# Altium PCB LimeSDR-Micro_mPCIe_1v4.PcbDoc (part 10 of 11)
Units mm, origin at the board's own origin, x right, y up, seen from the top; angles counter-clockwise.
Board outline 50.8 x 29.7 mm, 8 copper layers (Top, L2, L3, L4, L5, L6, L7, Bottom), stack 0.925 mm thick; 664 components, 386 nets, 2358 pads, 843 vias.
Unrouted connection lines stored in the file: 28.
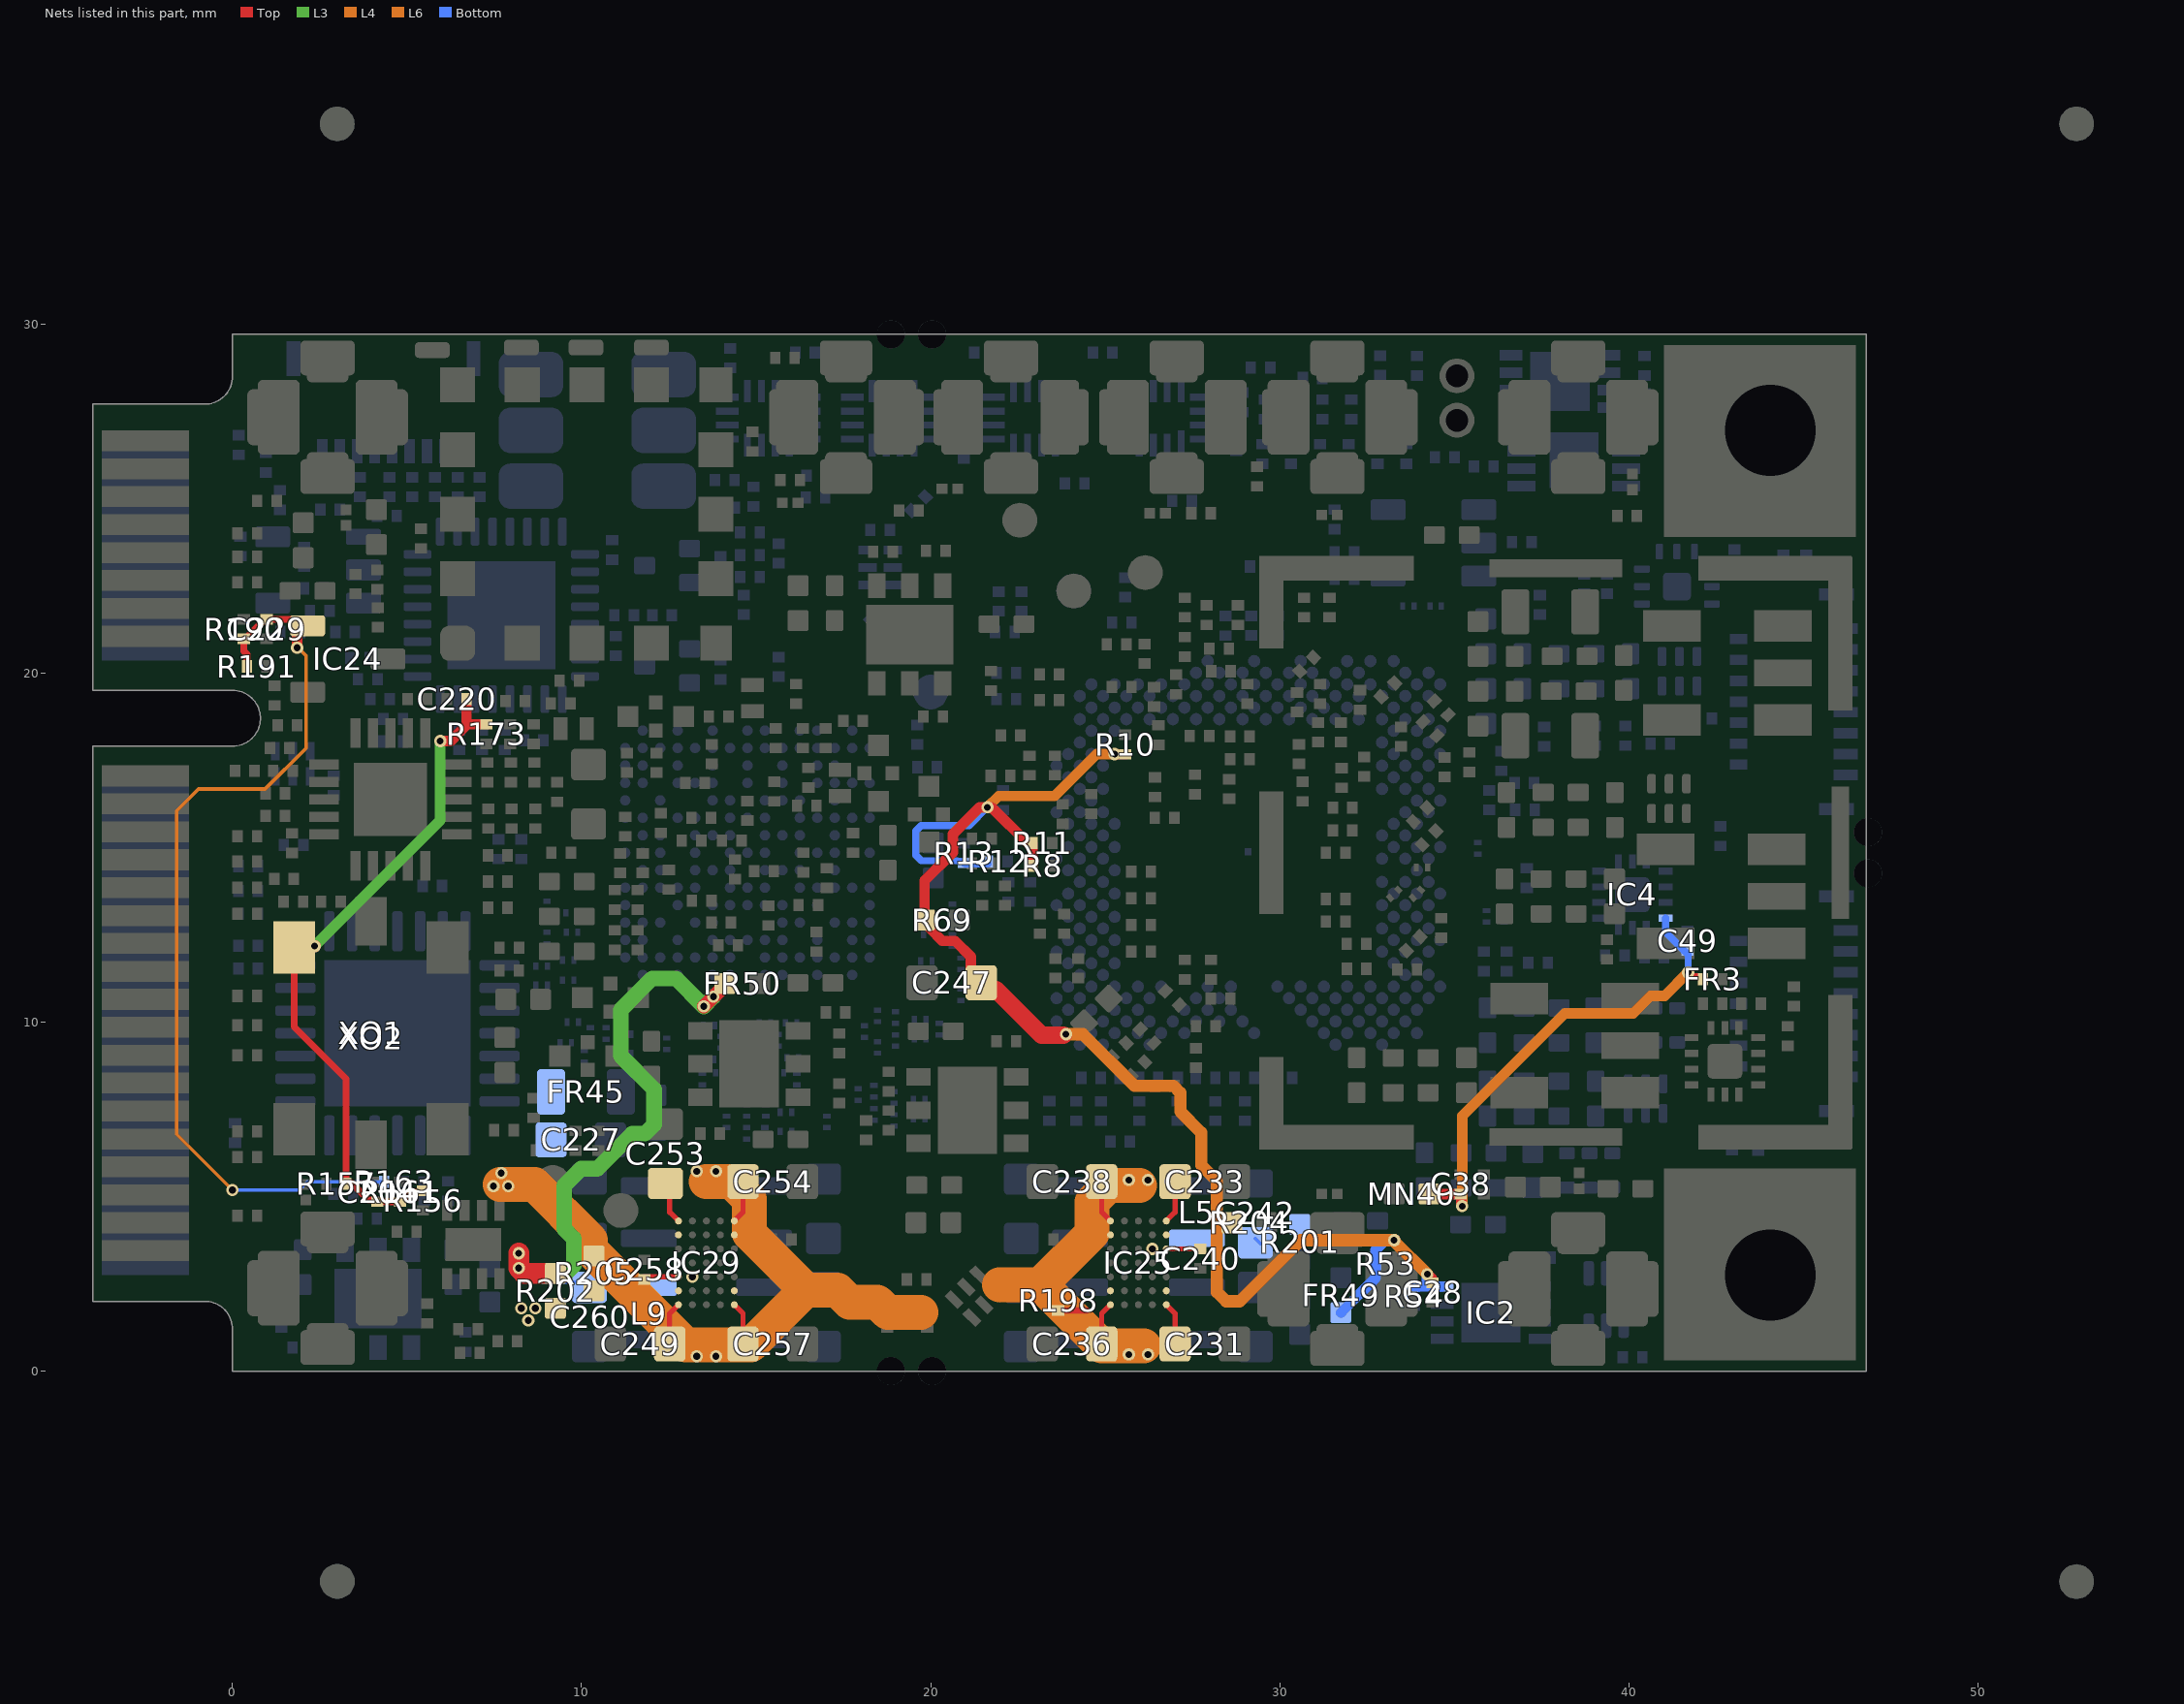
[diagram p14: the nets of this part, all layers, seen from the top]

## Via types
v1: diameter 0.35, hole 0.2, Top to Bottom, tented both sides, 684 vias
v2: diameter 0.35, hole 0.2, L5 to Bottom, tented both sides, 117 vias
v3: diameter 0.4, hole 0.2, Top to Bottom, tented both sides, 30 vias
v4: diameter 0.5, hole 0.2, Top to Bottom, tented both sides, 12 vias

## Nets (pads, with @x,y where several pads share a name; then routed paths per layer and width w, separated by ;. In a path a pad name is that pad's centre, name@x,y a point inside that pad or via, vN(x,y) a via of type N, cw(c..) or ccw(c..) an arc to the next point about the centre after c; other vN are vias at no path point) (continued)
VCC3P3_RF_RX2: C38.1 C49.1 FR3.1 IC4.4 MN40.2 | length 14.4
  Top w0.2: v1(41.7,11.425) 41.825,11.3 42.07,11.3 42.12,11.25 FR3.1@42.12,11.225
  Top w0.3: MN40.2@34.275,5.075 34.28,5.07 C38.1@35.175,5.07 35.2,5.07 35.2,4.764 35.225,4.739 v1(35.225,4.725)
  L4 w0.3: v1(35.225,4.725) 35.225,7.309 38.166,10.25 40.125,10.25 40.625,10.75 41.025,10.75 v1(41.7,11.425)
  Bottom w0.2: IC4.4@41.053,12.975 41.053,12.572 C49.1@41.69,11.935 ; v1(41.7,11.425) C49.1@41.7,11.945
VCC3P3_SW: C242.2 IC25.E2 L5.2 R201.1 | length 0.2
  Bottom w0.1: C242.2@29.3,3.8 C242.2@29.45,3.65
  other v1: 26.35,3.5
VCC_CLK: FR50.1 R202.2 R205.2 | length 17.4
  Top w0.4: v1(13.5,10.45) FR50.1@14.1,11.05
  Top w0.6: v1(8.2,3.375) v1(8.2,2.95) 8.35,2.8 R202.2@9.25,2.8
  L3 w0.45: v1(8.2,3.375) v1(8.2,2.95) 8.35,2.8 9.55,2.8 9.775,3.025 9.775,3.8 9.5,4.075 9.5,5.312 9.988,5.8 10.45,5.8 11.45,6.8 11.811,6.8 12.075,7.064 12.075,8.075 11.125,9.025 11.125,10.35 12.025,11.25 12.7,11.25 v1(13.5,10.45) v1(13.775,10.725)
VCC_CLK_SW: C260.2 IC29.E2 L9.2 R202.1 | length 1.4
  Bottom w0.1: 8.875,2.55 10.075,2.55 C260.2@10.225,2.4
  other v1: 8.475,1.45 8.275,1.8 8.675,1.8 13.175,2.7
VCC_EXT: C227.2 C231.2 C233.2 C236.2 C238.2 C240.1 C249.2 C253.2 C254.2 C257.2 C258.1 FR45.2 IC25.A1 IC25.A5 IC25.B1 IC25.B5 IC25.E1 IC25.F1 IC25.F5 IC25.G1 IC25.G5 IC29.A1 IC29.A5 IC29.B1 IC29.B5 IC29.E1 IC29.F1 IC29.F5 IC29.G1 IC29.G5 R198.1 R204.1 R205.1 | length 41.7
  Top w0.15: C258.1@11.8,2.7 IC29.E1@12.775,2.7 ; C249.2@12.525,0.775 12.525,1.65 IC29.G1@12.775,1.9 ; C253.2@12.525,5.425 12.525,5.375 12.525,4.55 IC29.A1@12.775,4.3 ; IC29.G5@14.375,1.9 14.625,1.65 C257.2@14.625,0.775 ; IC29.A5@14.375,4.3 14.625,4.55 C254.2@14.625,5.425 ; C236.2@24.9,0.775 24.9,1.65 IC25.A5@25.15,1.9 ; C238.2@24.9,5.425 24.9,4.55 IC25.G5@25.15,4.3 ; IC25.A1@26.75,1.9 27,1.65 C231.2@27,0.775 ; IC25.E1@26.75,3.5 C240.1@27.725,3.5 ; IC25.G1@26.75,4.3 27,4.55 C233.2@27,5.425
  Top w0.2: R198.1@23.65,1.74 24.45,1.74
  L4 w1: 7.675,5.35 8.65,5.35 10.25,3.75 10.25,3.479 12.979,0.75 14.85,0.75 16.425,2.325 ; 13.575,5.425 14.3,5.425 14.8,4.925 14.8,3.95 16.425,2.325 ; 19.725,1.675 18.775,1.675 18.475,1.975 17.675,1.975 17.325,2.325 16.425,2.325 ; 21.975,2.475 23.15,2.475 ; 25.975,5.325 25.1,5.325 24.625,4.85 24.625,3.95 23.15,2.475 ; 26.1,0.725 24.9,0.725 23.15,2.475
  other v1: 13.3,0.425 13.85,0.425 25.675,0.475 26.225,0.475 7.475,5.3 7.9,5.3 25.675,5.475 26.225,5.475 7.7,5.675 13.3,5.725 13.85,5.725
VCC_VREF_DAC: C229.1 IC24.1 R163.2 R190.1 R191.1 | length 27.2
  Top w0.15: R190.1@0.325,20.977 0.35,20.977 0.425,21.052 0.425,21.065 0.822,21.462 0.9,21.462 C229.1@0.975,21.537
  Top w0.2: R190.1@0.325,20.977 0.325,20.625 0.415,20.535 R191.1@0.415,20.187 ; C229.1@0.975,21.537 1.962,21.537 1.975,21.525 IC24.1@1.975,21.35
  Top w0.3: v1(1.85,20.725) 1.85,21.35 1.975,21.35 IC24.1@2.15,21.35
  L4 w0.1: v1(0,5.186) -1.6,6.786 -1.6,16.05 -0.975,16.675 0.934,16.675 2.104,17.845 2.104,20.496 v1@1.862,20.738
  Bottom w0.1: v1(0,5.186) 1.911,5.186 2.15,5.425 R163.2@4.345,5.425
VDIO_LMS: C28.1 C247.2 FR49.2 IC2.8 R8.1 R10.2 R11.2 R12.2 R13.2 R53.2 R54.2 R69.1 | length 43.2
  Top w0.3: C247.2@21.15,11.35 21.15,11.875 20.7,12.325 20.334,12.325 19.975,12.684 19.975,12.775 R69.1@19.825,12.925 19.825,14.05 20.635,14.86 20.635,15.386 21.399,16.15 v1(21.625,16.15) 21.75,16.15 22.795,15.105 22.92,15.105 R8.1@22.92,14.475 ; v1(25.27,17.676) 25.277,17.67 R10.2@25.575,17.67 ; v1@34.25,2.775 34.25,2.761 34.35,2.661 34.35,2.53 C28.1@34.375,2.53
  Top w0.5: C247.2@21.45,11.125 21.65,10.925 21.875,10.925 23.175,9.625 v1@23.8,9.625
  L4 w0.3: v1(21.625,16.15) 21.95,16.475 23.55,16.475 24.751,17.676 v1(25.27,17.676)
  L4 w0.35: v1(23.875,9.65) 24.361,9.65 25.836,8.175 26.95,8.175 27.15,7.975 27.15,7.436 27.75,6.836 27.75,5.9 28.2,5.45 28.2,2.264 28.464,2 28.85,2 30.6,3.75 v1(33.275,3.75)
  L6 w0.35: v1(33.275,3.75) 33.275,3.725 v1(34.225,2.775)
  Bottom w0.2: v1(21.625,16.15) 21.1,15.625 19.825,15.625 19.727,15.625 19.575,15.473 19.575,14.777 19.727,14.625 20.758,14.625 20.773,14.61 20.9,14.61 R13.2@20.95,14.56 20.985,14.525 R12.2@21.645,14.525
  Bottom w0.3: FR49.2@31.75,1.675 31.754,1.675 32.745,2.666 R53.2@32.745,3.075 32.745,3.47 33.025,3.75 v1(33.275,3.75) ; R54.2@33.85,2.43 34.21,2.43 ; 34.21,2.425 34.21,2.43 ; v1@34.21,2.765 34.21,2.43 ; 34.22,2.43 34.21,2.43 ; 34.28,2.425 IC2.8@34.65,2.425
XO_VC: C204.1 C220.2 R156.2 R157.2 R161.1 R173.1 XO1.1 XO2.1 | length 20.7
  Top w0.2: XO1.1@1.764,12.135 2.264,11.635 1.764,11.635 1.764,9.861 3.25,8.375 3.25,5.445 3.3,5.395 3.404,5.395 3.894,4.905 4.1,4.905 C204.1@4.15,4.855 R161.1@4.805,4.855 4.855,4.905 4.903,4.905 5.134,5.136 5.426,5.136 R156.2@5.455,5.165
  Top w0.3: v1(5.95,18.05) 6.25,18.05 6.705,18.505 6.705,18.53 ; C220.2@6.705,19.25 6.705,18.53 ; R173.1@7.3,18.53 R173.1@7.275,18.53 6.705,18.53
  Top w0.35: XO1.1@1.89,12.175 v1(2.35,12.175)
  L3 w0.3: v1(2.35,12.175) 5.95,15.775 v1(5.95,18.05)
pads on no net: C39.0 C40.0 C41.0 C117.0 C125.0 C135.0 C147.0 C151.0 C156.0 C176.0 C224.0 C225.0 C226.0 C227.0 C231.0 C232.0 C233.0 C234.0 C235.0 C236.0 C237.0 C238.0 C241.0 C242.0 C243.0 C244.0 C246.0 C247.0 C249.0 C250.0 C251.0 C252.0 C253.0 C254.0 C255.0 C257.0 C259.0 C260.0 F1.1 F2.1 F3.1 F4.1 F5.1 F6.1 F7.1 F8.1 FL1.1 FL2.1 FR37.0 FR40.0 FR44.0 FR45.0 FR46.0 FR47.0 FR48.0 FR49.0 FR50.0 IC1.A5 IC1.A13 IC1.A21 IC1.AB30 IC1.AB32 IC1.AC29 IC1.AC31 IC1.AC33 IC1.AD30 IC1.AD32 IC1.AE1 IC1.AE5 IC1.AE31 IC1.AE33 IC1.AF30 IC1.AF34 IC1.AG3 IC1.AG31 IC1.AG33 IC1.AH2 IC1.AH4 IC1.AH32 IC1.AJ1 IC1.AJ3 IC1.AJ5 IC1.AJ11 IC1.AJ13 IC1.AJ21 IC1.AJ27 IC1.AJ29 IC1.AJ31 IC1.AJ33 IC1.AK2 IC1.AK4 IC1.AK6 IC1.AK8 IC1.AK10 IC1.AK26 IC1.AK28 IC1.AK30 IC1.AK32 IC1.AK34 IC1.AL3 IC1.AL5 IC1.AL7 IC1.AL9 IC1.AL11 IC1.AL27 IC1.AL29 IC1.AL31 IC1.AL33 IC1.AM6 IC1.AM10 IC1.AM28 IC1.AM30 IC1.AM34 IC1.AN27 IC1.AN29 IC1.AN31 IC1.AP30 IC1.AP32 IC1.B2 IC1.B4 IC1.B12 IC1.B14 IC1.C1 IC1.C3 IC1.C5 IC1.C9 IC1.C11 IC1.C13 IC1.C15 IC1.C17 IC1.C19 IC1.C31 IC1.D2 IC1.D4 IC1.D8 IC1.D10 IC1.D12 IC1.D14 IC1.D18 IC1.D30 IC1.D32 IC1.E3 IC1.E9 IC1.E11 IC1.E13 IC1.E15 IC1.E23 IC1.E29 IC1.E31 IC1.F2 IC1.F4 IC1.F10 IC1.F12 IC1.F14 IC1.F16 IC1.F26 IC1.F32 IC1.G1 IC1.G29 IC1.H30 IC1.J1 IC1.J31 IC1.K30 IC1.K32 IC1.K34 IC1.L31 IC1.M2 IC1.M6 IC1.M30 IC1.M32 IC1.N31 IC1.N33 IC1.P30 IC1.P32 IC1.R33 IC1.Y32 IC3.1 IC3.8 IC3.10 IC3.11 IC3.12 IC3.14 IC4.1 IC4.8 IC4.10 IC4.11 IC4.12 IC4.14 IC6.D13 IC6.F13 IC6.F14 IC6.F15 IC6.G13 IC7.0 IC9.3 IC11.11 IC11.12 IC15.3 IC15.7 IC15.10 IC15.15 IC15.16 IC16.1 IC16.2 IC16.3 IC16.7 IC16.PAD IC17.5 IC17.7 IC17.11 IC17.12 IC17.20 IC17.22 IC17.24 IC18.1 IC24.0 IC25.D2 IC29.D2 IC30.0 L1.0 MN1.0 MN2.0 MN3.0 MN4.0 MN5.0 MN6.0 MN7.0 MN8.0 MN9.0 MN10.0 MN11.0 MN12.0 MN13.0 MN14.0 MN15.0 MN16.0 MN17.0 MN18.0 MN19.0 MN20.0 MN21.0 MN22.0 MN23.0 MN24.0 MN25.0 MN26.0 MN27.0 MN28.0 MN29.0 MN30.0 MN31.0 MN32.0 MN33.0 MN34.0 MN35.0 MN36.0 MN37.0 MN38.0 MN39.0 MN40.0 R15.0 R65.0 R69.0 R147.0 R201.0 R202.0 R204.0 R205.0 T1.6 T2.2 T3.5 T3.6 T4.5 T4.6 T5.6 T6.6 T7.2 T8.2 X3.10 X3.11 X3.13 X3.14 X8.1 X8.6 X8.8 X8.10 X8.12 X8.14 X8.16 X8.24 X8.28 X8.36 X8.38 X8.48 XO1.3

## Polygon pours and split planes (outlines as drawn)
GND on L3 "GND_L03_P014" (solid, remove dead copper, pour order 14): -4,2 -4,17.9 0,17.9 ccw(c0,18.7) 0,19.5 -4,19.5 -4,27.7 -0.8,27.7 ccw(c-0.8,28.5) 0,28.5 0,29.7 46.8,29.7 46.8,0 0,0 0,1.2 ccw(c-0.8,1.2) -0.8,2
VCC1P5 on L3 "VCC1P5_L03_P010" (solid, remove dead copper, pour order 10): 8.425,0.2 10.975,0.2 12.25,1.475 12.25,3.95 13.025,4.725 14.05,4.725 15.85,2.925 17.85,2.925 18.6,3.675 18.6,4.85 18.35,5.1 17.675,5.1 17.3,4.725 16.75,4.725 14.8,6.675 12.65,6.675 10.475,4.5 10.475,3.075 10.2,2.8 8.275,0.875 8.275,0.35
VCC0P9 on L3 "NONET_L-01_P-001" (solid, remove dead copper, pour order 7): 20.75,0.525 21.375,1.15 21.375,2.275 20.25,3.4 20.25,5.678 16.178,9.75 14.35,9.75 14.075,10.025 13.425,10.025 13.125,10.325 13.125,10.45 12.725,10.85 12.325,10.85 11.775,10.3 11.775,8.825 13.725,6.875 14.975,6.875 16.2,5.65 18,5.65 18.7,4.95 18.7,1.325 19.5,0.525
GND on L6 "GND_L06_P030" (solid, remove dead copper, pour order 30): -4,2 -4,17.9 0,17.9 ccw(c0,18.7) 0,19.5 -4,19.5 -4,27.7 -0.8,27.7 ccw(c-0.8,28.5) 0,28.5 0,29.7 46.8,29.7 46.8,0 0,0 0,1.2 ccw(c-0.8,1.2) -0.8,2
VCC2P05 on L6 "VCC2P05_L06_P000" (solid, remove dead copper, pour order 0): 17.775,2.45 18.675,2.45 19.725,3.5 24.139,3.5 25.475,4.85 26.525,4.85 30.775,0.6 34.075,0.6 34.3,0.825 34.3,1.875 30.175,6 28.55,6 27.075,7.475 24.15,7.475 22.225,5.55 19.475,5.55 19.225,5.55 18.4,4.725 17.8,4.725 17.4,4.325 17.4,2.825
GND on L2 "GND_L02_P016" (solid, remove dead copper, pour order 16): -4,2 -4,17.9 0,17.9 ccw(c0,18.7) 0,19.5 -4,19.5 -4,27.7 -0.8,27.7 ccw(c-0.8,28.5) 0,28.5 0,29.7 46.8,29.7 46.8,0 0,0 0,1.2 ccw(c-0.8,1.2) -0.8,2
GND on L2 "GND_L02_P012" (solid, remove dead copper, pour order 12): -4,2 -4,17.9 0,17.9 ccw(c0,18.7) 0,19.5 -4,19.5 -4,27.7 -0.8,27.7 ccw(c-0.8,28.5) 0,28.5 0,29.7 46.8,29.7 46.8,0 0,0 0,1.2 ccw(c-0.8,1.2) -0.8,2
GND on L4 "GND_L04_P024" (solid, remove dead copper, pour order 24): -4,2 -4,17.9 0,17.9 ccw(c0,18.7) 0,19.5 -4,19.5 -4,27.7 -0.8,27.7 ccw(c-0.8,28.5) 0,28.5 0,29.7 46.8,29.7 46.8,0 0,0 0,1.2 ccw(c-0.8,1.2) -0.8,2
VCC_EXT on L4 "VCC_EXT_L04_P006" (solid, remove dead copper, pour order 6): 19.55,1.175 21.375,1.175 22.175,1.975 22.175,2.975 20.35,2.975 19.55,2.175
GND on L7 "GND_L07_P018" (solid, remove dead copper, pour order 18): -4,2 -4,17.9 0,17.9 ccw(c0,18.7) 0,19.5 -4,19.5 -4,27.7 -0.8,27.7 ccw(c-0.8,28.5) 0,28.5 0,29.7 46.8,29.7 46.8,0 0,0 0,1.2 ccw(c-0.8,1.2) -0.8,2
GND on L5 "GND_L05_P022" (solid, remove dead copper, pour order 22): -4,2 -4,17.9 0,17.9 ccw(c0,18.7) 0,19.5 -4,19.5 -4,27.7 -0.8,27.7 ccw(c-0.8,28.5) 0,28.5 0,29.7 46.8,29.7 46.8,0 0,0 0,1.2 ccw(c-0.8,1.2) -0.8,2
GND on Top "GND_L01_P028" (solid, remove dead copper, pour order 28): -4,2 -4,17.9 0,17.9 ccw(c0,18.7) 0,19.5 -4,19.5 -4,27.7 -0.8,27.7 ccw(c-0.8,28.5) 0,28.5 0,29.7 46.8,29.7 46.8,0 0,0 0,1.2 ccw(c-0.8,1.2) -0.8,2
GND on Bottom "GND_L08_P026" (solid, remove dead copper, pour order 26): -4,2 -4,17.9 0,17.9 ccw(c0,18.7) 0,19.5 -4,19.5 -4,27.7 -0.8,27.7 ccw(c-0.8,28.5) 0,28.5 0,29.7 46.8,29.7 46.8,0 0,0 0,1.2 ccw(c-0.8,1.2) -0.8,2

## Other copper
Top:
  pour cut-out: 37.75,26.75 39.95,26.75 39.95,25.691 ccw(c40.291,25.691) 40.05,25.45 cw(c39.869,25.269) 40.125,25.269 40.125,24.625 cw(c39.85,24.625) 39.85,24.35 39.408,24.35 cw(c39.408,25.033) 38.925,24.55 ccw(c38.623,24.248) 38.623,24.675 37.775,24.675 cw(c37.775,25.075) 37.375,25.075 37.375,26.375 cw(c37.75,26.375)
  pour cut-out: 38.15,23.4 38.475,23.4 ccw(c38.475,23.675) 38.75,23.675 38.75,24.075 ccw(c38.45,24.075) 38.45,24.375 38.15,24.375
  pour cut-out: 30.425,5.4 30.425,2.825 32.875,2.825 32.875,4.15 cw(c33.2,4.15) 33.2,4.475 33.525,4.475 ccw(c33.525,4.725) 33.775,4.725 33.775,5.425 ccw(c33.475,5.425) 33.475,5.725 30.75,5.725 ccw(c30.75,5.4)
  pour cut-out: 43.25,8.3 44.75,8.3 ccw(c44.75,9.325) 45.775,9.325 45.775,15.725 ccw(c44.275,15.725) 44.275,17.225 41.3,17.225 41.3,16.375 44,16.375 cw(c44,15.325) 45.05,15.325 45.05,9.775 cw(c44.75,9.775) 44.75,9.475 43.25,9.475
  pour cut-out: 39.8,2.95 39.8,4.075 cw(c40.275,4.075) 40.275,4.55 40.55,4.55 ccw(c40.55,5.975) 41.975,5.975 41.975,7.125 cw(c42.05,7.125) 42.05,7.2 42.75,7.2 ccw(c42.75,7.5) 43.05,7.5 43.05,8.375 42.375,8.375 cw(c42.375,8.5) 42.25,8.5 42.25,9.225 ccw(c42.025,9.225) 42.025,9.45 41.2,9.45 ccw(c41.2,9.125) 40.875,9.125 40.875,7.372 cw(c40.278,7.372) 40.7,6.95 40.064,6.314 cw(c38.763,7.616) 38.763,5.775 37.2,5.775 ccw(c37.2,5.625) 37.05,5.625 37.05,2.95
  pour cut-out: 29.675,11.4 29.675,10.675 ccw(c30.025,10.675) 30.025,10.325 cw(c30.025,9) 31.35,9 31.35,8.05 ccw(c32,8.05) 32,7.4 38.025,7.4 38.025,11.375 36.425,11.375 cw(c36.425,11.7) 36.1,11.7 36.1,12.3 cw(c36.375,12.3) 36.375,12.575 39.45,12.575 cw(c39.45,12.3) 39.725,12.3 39.725,12 ccw(c40.2,12) 40.2,11.525 45.25,11.525 45.25,13.825 43.025,13.825 cw(c43.025,14.5) 42.35,14.5 42.35,15.2 ccw(c42,15.2) 42,15.55 41,15.55 41,17.2 36.275,17.2 ccw(c36.275,15.65) 34.725,15.65 34.725,11.625 cw(c34.4,11.625) 34.4,11.3 31.741,11.3 cw(c31.741,11.641) 31.5,11.4 ccw(c31.198,11.098) 31.198,11.525 29.8,11.525 ccw(c29.8,11.4)
  pour cut-out: 31.325,20.575 31.325,20.05 ccw(c31.725,20.05) 31.725,19.65 32.049,19.65 ccw(c32.049,21.101) 33.075,20.075 33.243,20.243 cw(c33.725,19.761) 33.725,20.443 33.782,20.443 cw(c33.782,20.225) 34,20.225 ccw(c35.05,20.225) 35.05,19.175 38.787,19.175 cw(c38.787,18.312) 39.65,18.312 ccw(c40.162,18.312) 40.162,17.8 41.85,17.8 ccw(c41.85,18.425) 42.475,18.425 42.475,20 cw(c43.15,20) 43.15,20.675 45.625,20.675 45.625,23.071 41.875,23.071 41.875,23.35 ccw(c41.55,23.35) 41.55,23.675 41.35,23.675 ccw(c41.35,23.225) 40.9,23.225 40.9,22.8 cw(c40.375,22.8) 40.375,22.275 ccw(c40.375,21.9) 40,21.9 40,21.675 cw(c39.325,21.675) 39.325,21 35.5,21 cw(c35.5,21.175) 35.325,21.175 ccw(c34.825,21.175) 34.825,21.675 33.386,21.675 ccw(c33.386,20.139) 32.3,21.225 31.991,20.916 cw(c31.65,21.258) 31.65,20.775 31.525,20.775 ccw(c31.525,20.575)
  pour cut-out: 31.35,24.25 ccw(c32.212,24.262) 32.225,23.4 38.15,23.4 38.15,24.375 32.825,24.375 cw(c32.85,24.575) 32.65,24.6 32.65,26.825 30.55,26.825 30.55,24.9 31.125,24.9 cw(c31.125,24.675) 31.35,24.675
  pour cut-out: 3.4,24.375 5.425,24.375 cw(c5.425,24.15) 5.65,24.15 ccw(c6.05,24.15) 6.05,23.75 7.25,23.75 7.25,25.175 4,25.175 cw(c4,25.45) 3.725,25.45 3.725,26.975 1.675,26.975 1.675,25.55 ccw(c2.85,25.55) 2.85,24.375
  region net NetC75_1: 33.075,11.35 33.2,11.35 33.225,11.325 33.525,11.325 33.525,11.7 33.375,11.85 33.225,11.85 33.075,11.7
  region net EXT_PPS: 26.725,24.575 26.325,24.975 26.613,25.262 27.05,25.262 27.05,24.9 26.805,24.655
  region net GND: 28.25,4.825 29.55,4.825 29.55,5.8 29.325,6.025 28.25,6.025
  region net VCC_CLK: 9.75,2.5 10.25,3 10.85,3 10.95,3.1 10.95,3.675 10.825,3.8 10.125,3.8 9.425,3.1 9.075,3.1 9,3.025 9,2.55 9.05,2.5
  region net VCC_CLK_SW: 8.3,2.1 8.075,1.875 8.075,1.6 8.425,1.25 9.425,1.25 9.75,1.575 9.75,2.1
  region net VCC_EXT: 11.9,1.225 11.45,1.675 10.4,1.675 10.05,2.025 10.05,2.575 10.25,2.775 11.725,2.775 12.075,2.425 12.075,1.375
  region net VCC3P3: 29.325,4.6 29.525,4.6 29.75,4.825 29.75,5.75 30.15,6.15 30.8,6.15 30.975,5.975 30.975,5.5 30.475,5 30.475,4.375 30,3.9 29.325,3.9
  region net VCC_EXT: 28.85,4.6 28,4.6 27.612,4.988 27,4.988 27,3.7 27.275,3.425 28.45,3.425 28.925,3.9 28.925,4.525
  region net VCC1P75: 20.875,4.55 20.875,3.95 20.725,3.8 20.175,3.8 20.025,3.95 20.025,4.1 20.475,4.55
  region net VCC0P9_AFE_SVDD: 12.4,12.375 12.5,12.475 12.5,13.35 12.4,13.45 9.85,13.45 9.5,13.1 9.5,10.45 9.675,10.275 10.3,10.275 10.475,10.45 10.475,12.125 10.725,12.375
  pour cut-out: 41,15.235 42.35,15.235 42.35,16.375 41,16.375
  region net GND: 1.9,5.7 1.175,5.7 1.175,6.35 1.9,6.35
  region net VCC0P9: 11.325,10.4 11.675,10.4 11.975,10.1 12.225,10.1 12.725,10.6 12.725,11.206 12.456,11.475 11.675,11.475 11.325,11.125
  region net VCC1P35: 11.75,18.975 11.75,19.275 11.625,19.4 10.6,19.4 10.5,19.3 10.5,18.863 11.012,18.35 11.75,18.35
  region net VCC1P8: 18.3,13.7 18.525,13.925 19.075,13.925 19.2,13.925 19.3,13.825 19.3,13.2 19.175,13.075 18.3,13.075
  pour cut-out: 7.25,25.175 7.25,25.475 5.625,25.475 5.625,25.175
  region net VCC1P8_AFE_OTVDD: 16.075,12.975 16.075,12.5 16.15,12.425 16.9,12.425 16.975,12.5 16.975,12.75 16.825,12.9 16.675,13.05 16.15,13.05
  region net GND: 10.9,14.425 10.7,14.225 10.7,13.7 10.775,13.625 12.675,13.625 12.725,13.675 12.725,13.95 12.625,14.05 12.25,14.05 11.875,14.425
  region net VCC1P8: 16.251,15.675 15.125,15.675 15.075,15.725 15.075,16.475 16.251,16.475
  region net VCC1P35: 11.475,17.55 11.5,17.575 11.5,18.05 11.75,18.3 11.75,18.975 11.625,19.1 11.025,19.1 10.9,18.975 10.9,17.95 11.1,17.75 11.1,17.575 11.125,17.55
  region net VCC1P35_SD_XVDD: 13.063,18.125 12.95,18.012 12.95,17.7 13.208,17.442 13.208,17.35 12.884,17.35 12.495,17.739 12.495,17.96 12.66,18.125 12.75,18.125
  region net VCC1P35_SD_XVDD: 12.75,18.125 13.375,18.125 13.825,18.575 13.825,19.05 13.6,19.275 12.6,19.275 12.45,19.125 12.45,18.005 12.54,17.915
  region net VCC1P35_SD_XVDD: 12.65,18.025 12.125,18.025 11.975,17.875 11.975,17.525 12.033,17.467 12.767,17.467
  region net VCC1P35_SD_XVDD: 13.375,16.65 13.85,16.65 13.925,16.725 13.925,17.525 13.9,17.55 13.4,17.55 13.35,17.5 13.35,16.675
  region net VCC1P35_AVDD_SD_PLL: 11.475,17.275 11.475,17.175 11.875,16.775 12.4,16.775 12.475,16.7 12.475,15.825 12.325,15.675 11.675,15.675 11.575,15.575 10.95,15.575 10.6,15.225 9.775,15.225 9.6,15.4 9.6,16.125 9.675,16.2 10.875,16.2 11.075,16.4 11.075,17.275 11.1,17.3 11.45,17.3
  region net VCC0P9: 13.175,15.325 13.175,13.745 13.925,13.75 13.975,13.8 13.975,14.716 14.175,14.916 14.175,15.45 14.075,15.55 13.4,15.55
  region net VCC_EXT: 26.65,3.825 26.65,3.5 27.75,3.5 27.9,3.65 27.9,3.825 27.625,4.1 26.95,4.1 26.75,3.9
  region net VCC_EXT: 12.875,2.375 12.875,2.7 11.775,2.7 11.625,2.55 11.625,2.375 11.9,2.1 12.575,2.1 12.775,2.3
  region net NetC234_2: 17.95,6.775 17.95,6.4 19.088,5.262 19.088,4.138 19.275,3.95 19.65,3.95 20,4.3 20,6.3 19.675,6.625 18.575,6.625 18.425,6.775
  region net VCC1P4_LMS: 18.3,9.525 18,9.225 18,7.825 17.95,7.775 17.95,7.075 18,7.025 18.325,7.025 18.525,7.225 18.525,8.225 18.8,8.5 18.8,9.025
  pour cut-out: 38.95,11.3 38.95,9.5 41.35,9.5 41.35,11.3
  region net GND: 23.65,0.204 22.403,0.204 22.2,0.407 22.2,1.375 22.6,1.775 22.969,1.775 23.369,1.375 23.65,1.375
  region net GND: 22.975,4.3 23.178,4.503 23.4,4.503 23.4,4.575 23.65,4.825 23.65,5.925 22.825,5.925 21.675,4.775 21.675,4.3
  region net GND: 15.875,4.825 17.4,4.825 17.4,5.775 17.15,6.025 15.875,6.025
  region net NetC250_2: 16.55,9.5 17.15,10.1 17.15,10.45 16.263,10.45 16.2,10.387 16.2,9.725 16.425,9.5
  region net GND: 18.14,23.325
  region net GND: 17.525,23.175 17.75,22.95 18.513,22.95 18.6,23.037 18.6,23.65 17.525,23.65
  region net VCC1P8_LMS: 39.1,17.55 39.325,17.775 39.525,17.775 39.65,17.9 39.65,18.725 39.525,18.85 38.525,18.85 38.35,18.675 38.35,17.85 38.65,17.55
  region net VCC1P8_LMS: 38.35,21 39.325,21 39.75,21.425 39.75,22.325 39.675,22.4 39.275,22.4 38.925,22.4 38.925,22.325 38.35,21.75
  region net GND: 28.25,0.175 29.45,0.175 29.875,0.6 29.875,1.425 29.6,1.7 28.991,1.7 28.7,1.409 28.7,0.775 28.25,0.775
  region net GND: 15.875,0.175 16.95,0.175 17.5,0.725 17.5,1.25 17.3,1.45 15.95,1.45 15.875,1.375
  region net VCC3P3_CLK: 15.825,6.475 16.075,6.225 17.05,6.225 17.375,6.55 17.375,7.825 16.825,7.825 16.5,8.15 15.868,8.15 15.825,8.1
  pour cut-out: -3.575,27.7 -1.15,27.7 -1.15,19.5 -3.575,19.5
  pour cut-out: -3.575,2 -1.15,2 -1.15,17.9 -3.575,17.9
  region net VCC1P4_LMS: 18.915,8.425 19.215,8.125 19.95,8.125 20,8.175 20,9.932 19.946,9.986 18.761,9.986 18.3,9.525 18.3,8.425
  region net VCC2P05: 16.55,21.8 16.55,20.975 16.3,20.725 15.5,20.725 15.35,20.875 15.35,21.675 15.475,21.8
  region net NetC243_2: 19.275,24.475 19,24.2 17.9,24.2 17.4,23.7 17.4,23.075 17.85,22.625 17.85,22.5 15.925,22.5 16.4,22.975 16.4,24.025 17.375,25 19.075,25 19.275,24.8
  region net VCC1P8_LMS: 20.175,23.75 19.9,24.025 19.5,24.425 19.5,24.9 19.6,25 21.15,25 21.915,24.235 21.915,22.365 21.695,22.145 20.08,22.145 20.05,22.175 20.05,23.05 20.175,23.175
  region net NetC50_1: 25.27,13.68
  region net VCC1P4_LMS: 19.65,8.425
  region net VCC1P8_LMS: 20.35,22.5
  region: 16.2,7.85
  region net VCC_EXT: 13.3,6.025 14.325,6.025 14.325,5.55 14.175,5.4 14.175,4.925 13.3,4.925
  region net VCC_EXT: 13.85,6.025 12.825,6.025 12.825,5.55 12.975,5.4 12.975,4.925 13.85,4.925
  region net VCC_EXT: 13.85,0.175 12.825,0.175 12.825,0.65 12.975,0.8 12.975,1.275 13.85,1.275
  region net VCC_EXT: 13.3,0.175 14.325,0.175 14.325,0.65 14.175,0.8 14.175,1.275 13.3,1.275
  region net NetIC29_A4: 14.075,4.725 14.175,4.625 14.175,3.85 14.1,3.775 13.975,3.775 13.85,3.9 13.85,4.6 13.975,4.725
  region net NetIC29_F4: 14.075,1.475 14.175,1.575 14.175,2.35 14.1,2.425 13.975,2.425 13.85,2.3 13.85,1.6 13.975,1.475
  region net NetIC29_F2: 13.075,1.475 12.975,1.575 12.975,2.35 13.05,2.425 13.175,2.425 13.3,2.3 13.3,1.6 13.175,1.475
  region net NetIC29_A2: 13.075,4.725 12.975,4.625 12.975,3.85 13.05,3.775 13.175,3.775 13.3,3.9 13.3,4.6 13.175,4.725
  region net VCC_EXT: 14.275,1.375 14.175,1.275 14.175,0.325 14.325,0.175 15.075,0.175 15.25,0.35 15.25,2.1 14.925,2.425 14.325,2.425 14.275,2.375
  region net VCC_EXT: 14.275,4.825 14.175,4.925 14.175,5.875 14.325,6.025 14.925,6.025 15.25,5.7 15.25,4.1 14.925,3.775 14.325,3.775 14.275,3.825
  region net VCC_EXT: 12.875,4.825 12.975,4.925 12.975,5.875 12.825,6.025 12.075,6.025 11.9,5.85 11.9,4.1 12.225,3.775 12.825,3.775 12.875,3.825
  region net VCC_EXT: 12.875,1.375 12.975,1.275 12.975,0.325 12.825,0.175 12.075,0.175 11.9,0.35 11.9,2.1 12.225,2.425 12.825,2.425 12.875,2.375
  region net VCC_EXT: 26.65,4.825 26.55,4.925 26.55,5.875 26.7,6.025 27.45,6.025 27.625,5.85 27.625,4.1 27.3,3.775 26.7,3.775 26.65,3.825
  region net VCC_EXT: 26.65,1.375 26.55,1.275 26.55,0.325 26.7,0.175 27.45,0.175 27.625,0.35 27.625,2.1 27.3,2.425 26.7,2.425 26.65,2.375
  region net VCC_EXT: 25.25,1.375 25.35,1.275 25.35,0.325 25.2,0.175 24.45,0.175 24.275,0.35 24.275,2.1 24.6,2.425 25.2,2.425 25.25,2.375
  region net VCC_EXT: 25.25,4.825 25.35,4.925 25.35,5.875 25.2,6.025 24.45,6.025 24.275,5.85 24.275,4.1 24.6,3.775 25.2,3.775 25.25,3.825
  region net NetIC25_A2: 26.45,1.475 26.55,1.575 26.55,2.35 26.475,2.425 26.35,2.425 26.225,2.3 26.225,1.6 26.35,1.475
  region net NetIC25_F2: 26.45,4.725 26.55,4.625 26.55,3.85 26.475,3.775 26.35,3.775 26.225,3.9 26.225,4.6 26.35,4.725
  region net NetIC25_F4: 25.45,4.725 25.35,4.625 25.35,3.85 25.425,3.775 25.55,3.775 25.675,3.9 25.675,4.6 25.55,4.725
  region net NetIC25_A4: 25.45,1.475 25.35,1.575 25.35,2.35 25.425,2.425 25.55,2.425 25.675,2.3 25.675,1.6 25.55,1.475
  region net VCC_EXT: 26.225,6.025 25.2,6.025 25.2,5.55 25.35,5.4 25.35,4.925 26.225,4.925
  region net VCC_EXT: 25.675,6.025 26.7,6.025 26.7,5.55 26.55,5.4 26.55,4.925 25.675,4.925
  region net VCC_EXT: 25.675,0.175 26.7,0.175 26.7,0.65 26.55,0.8 26.55,1.275 25.675,1.275
  region net VCC_EXT: 26.225,0.175 25.2,0.175 25.2,0.65 25.35,0.8 25.35,1.275 26.225,1.275
L2:
  pour cut-out: 3.6,3.075 1.95,3.075 1.95,4.625 3.6,4.625
  pour cut-out: 30.278,26.825 33.003,26.825 33.003,25.125 30.278,25.125
  pour cut-out: 37.178,26.825 39.903,26.825 39.903,25.125 37.178,25.125
  pour cut-out: 40.7,4.975 40.1,4.975 40.1,5.475 40.7,5.475
  pour cut-out: 39.7,4.975 39.1,4.975 39.1,5.475 39.7,5.475
  pour cut-out: 33.575,4.775 32.975,4.775 32.975,5.375 33.575,5.375
  pour cut-out: 38.05,4.975 37.45,4.975 37.45,5.575 38.05,5.575
  pour cut-out: 32.46,7.665 31.935,7.665 31.935,8.29 32.46,8.29
  pour cut-out: 32.94,7.715 32.94,8.24 33.565,8.24 33.565,7.715
  pour cut-out: 32.94,8.715 32.94,9.24 33.565,9.24 33.565,8.715
  pour cut-out: 35.662,7.665 35.035,7.665 35.035,8.29 35.662,8.29
  pour cut-out: 32.46,9.285 31.935,9.285 31.935,8.66 32.46,8.66
  pour cut-out: 35.662,9.285 35.035,9.285 35.035,8.66 35.662,8.66
  pour cut-out: 34.56,7.715 34.56,8.24 33.935,8.24 33.935,7.715
  pour cut-out: 34.56,8.715 34.56,9.24 33.935,9.24 33.935,8.715
  pour cut-out: 35.987,19.165 35.36,19.165 35.36,19.79 35.987,19.79
  pour cut-out: 35.987,20.785 35.36,20.785 35.36,20.16 35.987,20.16
  pour cut-out: 39.085,20.215 39.085,20.74 38.46,20.74 38.46,20.215
  pour cut-out: 39.085,19.215 39.085,19.74 38.46,19.74 38.46,19.215
  pour cut-out: 36.985,20.785 36.46,20.785 36.46,20.16 36.985,20.16
  pour cut-out: 37.465,20.215 37.465,20.74 38.09,20.74 38.09,20.215
  pour cut-out: 37.465,19.215 37.465,19.74 38.09,19.74 38.09,19.215
  pour cut-out: 36.985,19.165 36.46,19.165 36.46,19.79 36.985,19.79
  pour cut-out: 40.085,19.165 39.56,19.165 39.56,19.79 40.085,19.79
  pour cut-out: 40.085,20.785 39.56,20.785 39.56,20.16 40.085,20.16
  pour cut-out: 39.858,16.885 39.333,16.885 39.333,16.26 39.858,16.26
  pour cut-out: 39.858,15.265 39.333,15.265 39.333,15.89 39.858,15.89
  pour cut-out: 36.758,15.265 36.233,15.265 36.233,15.89 36.758,15.89
  pour cut-out: 37.238,15.315 37.238,15.84 37.863,15.84 37.863,15.315
  pour cut-out: 37.238,16.315 37.238,16.84 37.863,16.84 37.863,16.315
  pour cut-out: 36.758,16.885 36.233,16.885 36.233,16.26 36.758,16.26
  pour cut-out: 38.858,15.315 38.858,15.84 38.233,15.84 38.233,15.315
  pour cut-out: 38.858,16.315 38.858,16.84 38.233,16.84 38.233,16.315
  pour cut-out: 38.798,13.84 38.798,14.365 38.173,14.365 38.173,13.84
  pour cut-out: 38.798,12.84 38.798,13.365 38.173,13.365 38.173,12.84
  pour cut-out: 39.9,14.41 39.273,14.41 39.273,13.785 39.9,13.785
  pour cut-out: 36.698,14.41 36.173,14.41 36.173,13.785 36.698,13.785
  pour cut-out: 39.9,12.79 39.273,12.79 39.273,13.415 39.9,13.415
  pour cut-out: 37.178,13.84 37.178,14.365 37.803,14.365 37.803,13.84
  pour cut-out: 37.178,12.84 37.178,13.365 37.803,13.365 37.803,12.84
  pour cut-out: 36.698,12.79 36.173,12.79 36.173,13.415 36.698,13.415
  pour cut-out: 38.78,9.8 40.86,9.8 40.86,11.55 38.78,11.55
  pour cut-out: 45.125,13.125 43.408,13.125 43.408,11.65 45.125,11.65
  pour cut-out: 45.675,22.215 43.595,22.215 43.595,20.465 45.675,20.465
  pour cut-out: 42.495,19.525 40.415,19.525 40.415,17.775 42.495,17.775
  pour cut-out: 42.15,22.025 40.415,22.025 40.415,20.465 42.3,20.465 42.3,21.875
  pour cut-out: 42.308,13.125 40.228,13.125 40.228,11.375 42.308,11.375
  pour cut-out: 42.308,15.575 40.228,15.575 40.228,14.065 42.308,14.065
  pour cut-out: 38.12,8.845 36.04,8.845 36.04,7.095 38.12,7.095
  pour cut-out: 38.12,11.54 36.04,11.54 36.04,9.79 38.12,9.79
  pour cut-out: 33.022,2.85 30.297,2.85 30.297,4.55 33.022,4.55
  pour cut-out: 39.922,2.85 37.197,2.85 37.197,4.55 39.922,4.55
L3:
  region net VCC1P75: 8.65,3.7 8.65,3.275 8.725,3.2 9.35,3.2 9.45,3.3 9.45,3.625 9.15,3.925 8.875,3.925
  region net VCC1P75: 20.025,3.892 20.142,3.775 20.65,3.775 20.825,3.95 20.825,4.275 20.575,4.525 20.45,4.525 20.025,4.1
  region net VCC1P8: 21.525,6.6 20.925,6 20.925,5.5 21.125,5.3 21.625,5.3 22.025,5.7 22.025,6.1
L4:
  region net VCC2P05: 19.45,26.375 19.075,26 19.075,25.5 19.1,25.5 19.4,25.2 19.825,25.2 19.875,25.25 19.875,25.4 20.191,25.716
  region net VCC1P25_LMS: 10.337,5.438 10.8,4.975 10.925,4.975 11.25,5.3 11.412,5.462 11,5.875 10.737,5.875
  region net VCC_EXT: 13.975,5.925 13.225,5.925 13.075,5.775 13.075,5.225 13.375,4.925 13.975,4.925
  region net VCC1P8_LMS: 28.4,7.375 27.6,7.375 27.5,7.475 27.5,7.675 27.575,7.75 27.775,7.75 27.9,7.875 28.4,7.875
  region: 28.5,7.375
  region net VCC3P3_CLK: 16.25,6.45 16.4,6.3 17.1,6.3 17.225,6.425 17.225,6.725 16.85,7.1 16.375,7.1 16.25,6.975
  region net VCC1P25_LMS: 24.375,6.125 26.775,6.125 27,6.35 27,6.625 26.675,6.95 26.3,6.95 26.05,7.2 24.375,7.2
  region net VCC2P05: 16.25,20.725 16.575,21.05 16.575,21.8 15.775,22.6 15.7,22.6 15.425,22.325 15.425,20.8 15.5,20.725
  region net VCC1P25_LMS: 2.1,2.875 2,2.975 2,3.85 2.15,4 2.625,4 3.043,3.582 3.043,3.168 2.75,2.875
L6:
  region net VCC0P9: 14.925,14.575 15.05,14.7 15.05,14.925 15.15,15.025 15.425,15.025 15.925,14.525 15.925,14.275 15.725,14.075 14.925,14.075
  region net VCC1P4_LMS: 19.825,8.275 20.25,8.275 20.525,8.55 20.525,8.875 20.1,9.3 19.275,9.3 19.175,9.2 19.175,8.925
  text "A" at -3.025,23.55 h0.7
  text "V" at -2.025,23.55 h0.7
  text "L" at -2.55,22.975 h0.7
  text "D" at -2.775,21.85 h0.7
  text "R" at -2.225,21.85 h0.7
Bottom:
  pour cut-out: 39.148,13.875 38.8,13.875 ccw(c38.8,13.4) 38.325,13.4 38.325,12.175 ccw(c39.8,12.175) 39.8,10.7 39.8,13.223 ccw(c39.148,13.223)
  pour cut-out: 40.638,22.975 40.375,22.975 cw(c40.375,23.175) 40.175,23.175 ccw(c38.95,23.175) 38.95,24.4 37.975,24.4 ccw(c37.975,24.075) 37.65,24.075 37.65,23.775 ccw(c38,23.775) 38,23.425 39.1,23.425 cw(c39.1,22.975) 39.55,22.975 39.55,22.8 ccw(c40.375,22.8) 40.375,21.975 40.638,21.975
  pour cut-out: 35.275,7.3 34.33,7.3 cw(c34.33,9.605) 32.7,7.975 32.399,8.276 cw(c33.424,9.3) 31.975,9.3 31.975,10.225 33.012,10.225 33.012,8.971 33.482,8.5 35.275,8.5
  pour cut-out: 30.355,8.523 ccw(c31.629,8.523) 30.728,7.622 32.575,5.775 ccw(c33.179,6.379) 33.179,5.525 33.4,5.525 33.4,6.5 31.262,8.638 cw(c31.774,9.15) 31.05,9.15 30.355,9.15
  pour cut-out: 31.925,19.925 31.925,20.8 cw(c32.65,20.8) 32.65,21.525 33.886,21.525 cw(c33.886,20.586) 34.55,21.25 ccw(c35.516,22.216) 35.516,20.85 35.55,20.85 35.55,19.25 cw(c35.55,19.914) 35.081,19.444 33.971,20.554 ccw(c33.8,20.384) 33.8,20.625 33.425,20.625 ccw(c33.425,20.275) 33.075,20.275 33.075,19.925
  region net GND: 10.625,0.25 10.825,0.45 10.825,1.15 10.575,1.4 9.875,1.4 9.625,1.15 9.625,0.875 10.25,0.25
  region net VCC3P3: 32.1,3.187 32.3,3.387 32.3,4.5 32.15,4.65 31.35,5.45 31.35,5.875 31.075,6.15 30.15,6.15 29.975,5.975 29.975,5.6 30.7,4.875 30.813,4.875 31.2,4.487 31.2,3.675 31.688,3.187
  region net VCC3P3: 30.225,1.75 30.225,3.5 30.925,3.5 31.425,4 31.425,4.025 32.125,4.025 32.1,4 32.1,2.375 31.55,2.375 31.4,2.225 30.925,1.75
  region net VCC3P3_SW: 29.675,3.15 30.225,3.7 30.925,3.7 31.025,3.8 31.025,4.5 30.85,4.675 29.725,4.675 29.3,4.25 28.7,4.25
  region net VCC3P3_SW: 26.475,3.675 27.05,4.25 29.75,4.25 29.875,4.125 29.875,3.35 29.675,3.15 27.35,3.15 27.125,3.375 26.875,3.375 26.65,3.15 26.325,3.15 26.175,3.3 26.175,3.525 26.325,3.675
  region net VCC0P9: 21.475,1.025 21.025,0.575 19.5,0.575 19.425,0.65 19.425,1.2 20.15,1.925 20.8,1.925 21.2,2.325 21.475,2.325
  region net VCC0P9: 25.425,2.525 25.15,2.25 25.15,2.125 24.95,1.925 23.725,1.925 23.375,1.575 22.025,1.575 21.475,1.025 20.95,1.025 20.95,2.725 21.275,3.05 25.55,3.05 25.7,2.9 25.7,2.6 25.625,2.525
  region net GND: 14.5,28 14.5,27 13.6,27 13.425,27.175 13.425,27.65 13.775,28
  region net VCC1P35: 30.475,23.275 30.475,24.1 30.425,24.15 30.25,24.15 29.55,23.45 29.55,23.275
  region net VCC1P35_LDO: 31.572,24.147 32.4,24.975 33.5,24.975 33.6,24.875 33.6,24.325 33.05,23.775 31.975,23.775 31.65,23.45
  region net VCC1P35_LDO: 30.725,22.85 31.05,22.85 31.375,23.175 31.65,23.175 31.8,23.325 31.8,24.225 31.75,24.275 31.125,24.275 30.675,23.825 30.675,22.9
  region net VCC1P35: 29.55,23.275 29.55,22.75 29.6,22.7 30.425,22.7 30.475,22.75 30.475,23.275 30.425,23.325 29.6,23.325
  region net VCC1P35_SW: 29.2,23.325 28.85,23.325 28.6,23.075 28.6,22.3 28.7,22.2 29.05,22.2 29.15,22.3 29.15,22.375 29.3,22.525 29.3,23.225
  region net VCC_CLK_SW: 8.375,2.7 8.1,2.425 8.1,1.575 8.4,1.275 9.35,1.275 9.625,1.55 9.625,1.85 8.775,2.7
  region net VCC1P5: 7.025,1.575 7.025,1.15 7.975,0.2 9,0.2 9.25,0.45 9.25,0.875 9.025,1.1 8.375,1.1 7.9,1.575
  region net VCC1P35_SW: 26.475,2.525 27.05,1.95 29.75,1.95 29.875,2.075 29.875,2.85 29.675,3.05 27.35,3.05 27.125,2.825 26.875,2.825 26.65,3.05 26.325,3.05 26.175,2.9 26.175,2.675 26.325,2.525
  region net GND: 20.225,12.225 20.225,11.8 20.3,11.725 20.825,11.725 20.95,11.85 20.95,12.175 20.85,12.275 20.275,12.275
  region net VCC1P8_LMS: 38.6,22.425 39.55,22.425 39.575,22.4 39.575,21.75 39.275,21.45 38.105,21.45 38.105,21.93
  region net VCC1P8: 21.276,3.699 20.425,4.55 20.425,5.75 20.825,6.15 21.6,6.15 21.725,6.025 21.725,4.583
  region net VCC3P3_MPCIE: 10.875,8.75 11.85,8.75 12.525,8.075 12.525,7.4 12.45,7.325 11.9,7.325 11.7,7.125 11.475,7.125 11.35,7.25 10.725,7.25 10.725,8.6
  region net VCC_EXT: 9.525,8.85 9.9,8.475 9.9,6.325 8.6,5.025 7.45,5.025 7.275,5.2 7.275,6.05 8.375,7.15 8.375,8.475 8.75,8.85
  region net VCC1P25_LMS: 2.9,3.825 2.5,4.225 2.344,4.069 2.344,3.594 2.969,3.594 3.075,3.7 3.075,3.825
  region net VCC1P25_LMS: 2.85,3 2.85,3.418 2.793,3.475 2.175,3.475 1.7,3
  region net VCC1P25_LMS: 1.7,3 1.825,2.875 2.725,2.875 2.85,3
  region net GND: 45.603,18.748 45.603,19.575 46.075,19.575 46.075,18.748
  region net GND: 23.25,4.875 23.25,5.8 23.1,5.95 22.425,5.95 22.1,5.625 22.1,5.1 22.45,4.75 23.125,4.75
  region net VCC1P5: 7.025,2.275 7.025,1.575 7.475,1.125 7.825,1.125 7.975,1.275 7.975,2.075 7.775,2.275
  region net VCC1P25_LMS: 2.5,4.55 2.7,4.75 3,4.75 3.1,4.85 3.1,5.225 3.05,5.275 2.562,5.275 2.5,5.213
  region net VCC1P25_LMS: 1.425,3.722 1.425,4.325 2.375,5.275 2.7,5.275 2.7,4.9 2.5,4.7 2.5,3.75 2.1,3.35 1.6,3.35
  region net GND: -1.5,10.55 -1.2,10.55 -1.1,10.65 -1.1,10.75 -1.025,10.825 -0.775,10.825 -0.725,10.775 -0.725,10 -0.85,9.875 -1.075,9.875 -1.5,10.3
  region net GND: 16.525,0.25 16.325,0.45 16.325,1.15 16.575,1.4 17.275,1.4 17.525,1.15 17.525,0.875 16.9,0.25
  region net GND: 28.7,4.937 28.7,5.763 28.737,5.8 29.55,5.8 29.9,5.45 29.9,5.05 29.65,4.8 28.837,4.8
  region net GND: 9.225,4.8 10.687,4.8 10.875,4.988 10.875,5.725 10.4,6.2 9.928,6.2 9.225,5.497
  pour cut-out: 34.125,3.525 42.25,3.525 42.25,11.25 32.975,11.25 32.975,4.675
  region net VCC3P3_RF: 31,1.35 31.175,1.35 31.625,0.9 31.625,0.45 31.475,0.3 30.35,0.3 29.95,0.7 29.95,0.925 30.375,1.35
  region net VCC3P3_RF: 31,1.35 31,0.825 30.7,0.525 30.125,0.525 29.95,0.7 29.95,0.925 30.375,1.35 30.65,1.35
  region net GND: 28.7,1.15 28.7,0.35 28.85,0.2 29.725,0.2 29.8,0.275 29.8,1.05 29.9,1.15 29.9,1.25 29.75,1.4 28.95,1.4
  region net GND: 23.2,1.15 23.2,0.375 23.05,0.225 22.225,0.225 22.1,0.35 22.1,1.05 22.1,1.425 22.925,1.425
  pour cut-out: 36.25,18.85 39.861,18.85 39.861,21.956 36.25,21.956
  region net VCC1P8_LMS: 38.8,18.65 39,18.85 39.9,18.85 40.125,18.625 40.125,18.325 40.05,18.25 39.725,18.25 39.525,18.05 39.375,18.05 39.175,18.25 38.975,18.25 38.8,18.425
  pour cut-out: -3.575,27.7 -1.15,27.7 -1.15,19.5 -3.575,19.5
  pour cut-out: -3.575,2 -1.15,2 -1.15,17.9 -3.575,17.9
  region: 20.9,5.55
  region net VCC1P25_LMS: 25.705,6.495 25.875,6.325 27.25,6.325 27.573,6.648 27.075,7.145 25.945,7.145 25.705,6.905
  region net VCC1P25_LMS: 2.975,3.125 2.85,3.125 2.725,3 1.7,3 1.425,3.275 1.425,3.775 2.05,3.775 2.7,3.775 2.975,3.5
  region net VCC1P25_LMS: 3.225,3.475
  region net VCC1P75: 13.05,3.675 12.475,4.25 9.775,4.25 9.65,4.125 9.65,3.35 9.85,3.15 12.175,3.15 12.4,3.375 12.65,3.375 12.875,3.15 13.2,3.15 13.35,3.3 13.35,3.525 13.2,3.675
  region net VCC1P75: 11.2,4.25 10.8,4.65 9.8,4.65 8.85,4.65 8.65,4.45 8.65,3.3 8.8,3.15 10.675,3.15 11.2,3.675
  region net VCC_CLK_SW: 11.125,2.35 10.325,1.55 9.725,1.55 8.575,1.55 8.575,2.7 10.95,2.7 11.125,2.525
  region net VCC_CLK_SW: 13.05,2.525 12.475,1.95 9.775,1.95 9.213,2.513 9.75,3.05 12.175,3.05 12.4,2.825 12.65,2.825 12.875,3.05 13.2,3.05 13.35,2.9 13.35,2.675 13.2,2.525
  region net NetIC29_F2: 13.325,2.25 13.3,2.225 13.3,1.15 12.8,0.65 11.125,0.65 11.1,0.675 11.1,1.3 11.575,1.775 12.575,1.775 12.875,2.075 12.875,2.2 13.1,2.425 13.175,2.425 13.325,2.275
  region net NetIC29_A2: 13.325,3.95 13.3,3.975 13.3,5.05 12.8,5.55 11.125,5.55 11.1,5.525 11.1,4.9 11.575,4.425 12.575,4.425 12.875,4.125 12.875,4 13.1,3.775 13.175,3.775 13.325,3.925
  region net NetIC29_A4: 13.825,3.95 13.85,3.975 13.85,5.05 14.35,5.55 16.025,5.55 16.05,5.525 16.05,4.9 15.575,4.425 14.575,4.425 14.275,4.125 14.275,4 14.05,3.775 13.975,3.775 13.825,3.925
  region net VCC1P5: 14.1,3.675 14.375,3.95 14.375,4.075 14.575,4.275 15.8,4.275 16.15,4.625 17.425,4.625 17.625,4.825 17.625,5 17.75,5.125 18.3,5.125 18.475,4.95 18.475,3.725 17.9,3.15 13.975,3.15 13.825,3.3 13.825,3.6 13.9,3.675
  region net VCC2P05: 14.1,2.525 14.375,2.25 14.375,2.125 14.575,1.925 15.8,1.925 16.15,1.575 17.5,1.575 18.025,1.575 18.65,2.2 18.65,2.95 18.55,3.05 13.975,3.05 13.825,2.9 13.825,2.6 13.9,2.525
  region net NetIC29_F4: 13.825,2.25 13.85,2.225 13.85,1.15 14.35,0.65 16.025,0.65 16.05,0.675 16.05,1.3 15.575,1.775 14.575,1.775 14.275,2.075 14.275,2.2 14.05,2.425 13.975,2.425 13.825,2.275
  region net NetIC25_F4: 25.7,3.95 25.675,3.975 25.675,5.05 25.175,5.55 23.5,5.55 23.475,5.525 23.475,4.9 23.95,4.425 24.95,4.425 25.25,4.125 25.25,4 25.475,3.775 25.55,3.775 25.7,3.925
  region net VCC1P8: 25.425,3.675 25.15,3.95 25.15,4.075 24.95,4.275 23.725,4.275 23.375,4.625 22.425,4.625 21.525,5.525 21.125,5.525 20.7,5.1 20.7,4.275 21.825,3.15 25.55,3.15 25.7,3.3 25.7,3.6 25.625,3.675
  region net NetIC25_A4: 25.7,2.25 25.675,2.225 25.675,1.15 25.175,0.65 23.5,0.65 23.475,0.675 23.475,1.3 23.95,1.775 24.95,1.775 25.25,2.075 25.25,2.2 25.475,2.425 25.55,2.425 25.7,2.275
  region net NetIC25_A2: 26.2,2.25 26.225,2.225 26.225,1.15 26.725,0.65 28.4,0.65 28.425,0.675 28.425,1.3 27.95,1.775 26.95,1.775 26.65,2.075 26.65,2.2 26.425,2.425 26.35,2.425 26.2,2.275
  region net NetIC25_F2: 26.2,3.95 26.225,3.975 26.225,5.05 26.725,5.55 28.4,5.55 28.425,5.525 28.425,4.9 27.95,4.425 26.95,4.425 26.65,4.125 26.65,4 26.425,3.775 26.35,3.775 26.2,3.925
MultiLayer:
  pour cut-out: -4,2 -3.575,2 -3.575,17.9 -4,17.9
  pour cut-out: -4,19.5 -3.575,19.5 -3.575,27.7 -4,27.7

## Silkscreen, mask and mechanical layers (free items; w line width, h text height)
TopOverlay:
  lines w0.15: 5.15,24.425 5.15,27.425 ; 7.275,19.55 8.825,19.55 ; 11.475,19.55 13.025,19.55 ; 14.825,4.4 16.15,4.4 ; 15.15,21.675 15.15,27.425
  lines w0.2: 15.6,23.25 15.6,24.35 ; 16.275,24.35 16.275,23.25 ; 15.6,24.35 15.825,23.675 15.375,23.675 15.6,24.35 ; 16.275,23.25 16.5,23.925 16.05,23.925 16.275,23.25
  lines w0.25: 0.275,27.013 0.275,25.487 ; 1.442,3.875 1.442,5.4 ; 23.875,26.1 23.875,24.575 ; 25.55,24.575 25.55,26.1 ; 0.275,25.487 0.558,26.338 -0.008,26.338 0.275,25.487 ; 1.442,5.4 1.725,4.55 1.158,4.55 1.442,5.4 ; 23.875,24.575 23.592,25.425 24.158,25.425 23.875,24.575 ; 25.55,26.1 25.267,25.25 25.833,25.25 25.55,26.1
  lines w0.3: 34.1,24.775 34.1,26.463 ; 35.229,1.6 35.229,3.088 ; 36,24.787 36,26.475 ; 34.1,26.463 34.442,25.438 33.758,25.438 34.1,26.463 ; 35.229,3.088 34.888,2.063 35.571,2.063 35.229,3.088 ; 36,26.475 35.658,25.45 36.342,25.45 36,26.475
  text "G" at 6.875,28.625 h0.7
  text "R" at 8.775,28.625 h0.7
  text "T" at 10.65,28.625 h0.7
  text "I" at 4,28.325 h0.7
  text "IO" at 18.35,28.3 h0.7
  text "I" at 23.6,28.3 h0.7
  text "O" at 25.1,28.3 h0.7
  text "O" at 32.775,28.3 h0.7
  text "I" at 36.7,28.3 h0.7
  text "G" at 5.275,28.15 h0.55
  text "P" at 5.275,27.3 h0.55
  text "B" at 5.275,26.45 h0.55
  text "1" at -1.2,26.25 h0.55
  text "7" at 5.275,25.6 h0.55
  text "CLK" at 16.375,23.95 h0.8
  text "ANT" at 0,23.619 h0.8 r90
  text "TX" at 28.9,23.35 h1
  text "A" at 31.9,23.35 h1
  text "PA" at 36.1,23.325 h0.8
  text "EN" at 37.85,23.325 h0.8
  text "PPS" at 23.425,23.275 h0.8
  text "LA" at 27,23.175 h0.8
  text "IO" at 27.45,22.05 h0.8
  text "GNSS" at 0,19.811 h0.8 r90
  text "17" at -1.2,16.625 h0.55
  text "SDR" at 26.1,14.7 h1.5 r90
  text "Micro" at 27.95,12.1 h1.5 r90
  text "mPCIe" at 29.15,12.025 h1.5 r90
  text "Lime" at 25.375,11.7 h1.5 r90
  text "v.PROJECT_VERSION" at 29.625,9.025 h1.5 r90
  text "mPCIe" at -0.025,6.825 h0.8 r90
  text "ADF" at 0.025,3.225 h0.8 r90
  text "B" at 33.625,2.825 h1
  text "A" at 35.475,2.825 h1
  text "50" at -1.175,2.275 h0.55
  text "LED" at 18.1,1.35 h0.7 r90
  text "1" at 18.7,0.45 h0.7 r90
  text "2" at 21.05,0.325 h0.7 r90
  text "I" at 4,0.175 h0.7
  text "I" at 36.575,0.175 h0.7
  text "I" at 32.9,0.15 h0.7
  text "RX" at 33.975,-0.225 h1
BottomOverlay:
  drawing of 235 lines, arcs and shapes, not listed
  text "TDO" at 9.575,27.75 h0.5 r270
  text "RST" at 10.55,27.75 h0.5 r270
  text "TDI" at 9.575,26.075 h0.5 r270
  text "TCK" at 10.525,26.025 h0.5 r270
  text "GPIO" at -1.225,24.425 h0.8 r270
  text "1P8" at 10.5,24.425 h0.5 r270
  text "TMS" at 9.575,24.375 h0.5 r270
  text "LMS7002M" at 31.15,23.35 h0.7
  text "JTAG" at 15.75,21.175 h0.8 r270
  text "CLK" at 20.925,21.075 h0.55
  text "OUT" at 20.925,20.225 h0.55
  text "16" at 0.15,20.2 h0.55
  text "18" at 0.15,16.625 h0.55
  text "EXT" at 45,14.65 h0.7
  text "LA" at 46.5,14.65 h0.7
  text "BB" at 44.15,13.725 h0.7
  text "TX2" at 46.675,13.725 h0.7
  text "mPCIe" at -1.15,9.701 h0.8 r270
  text "Lime" at 34.525,7.125 h1.5
  text "-" at 30.25,6.15 h1.5
  text "mPCIe" at 24.85,6 h1.5
  text "Micro" at 29.675,6 h1.5
  text "SDR" at 33.25,6 h1.5
  text "v.PROJECT_VERSION" at 32.525,4.925 h1.5
  text "52" at 0.175,2.65 h0.55